# EAGLE board melody generator (EAGLE 6.5.0)
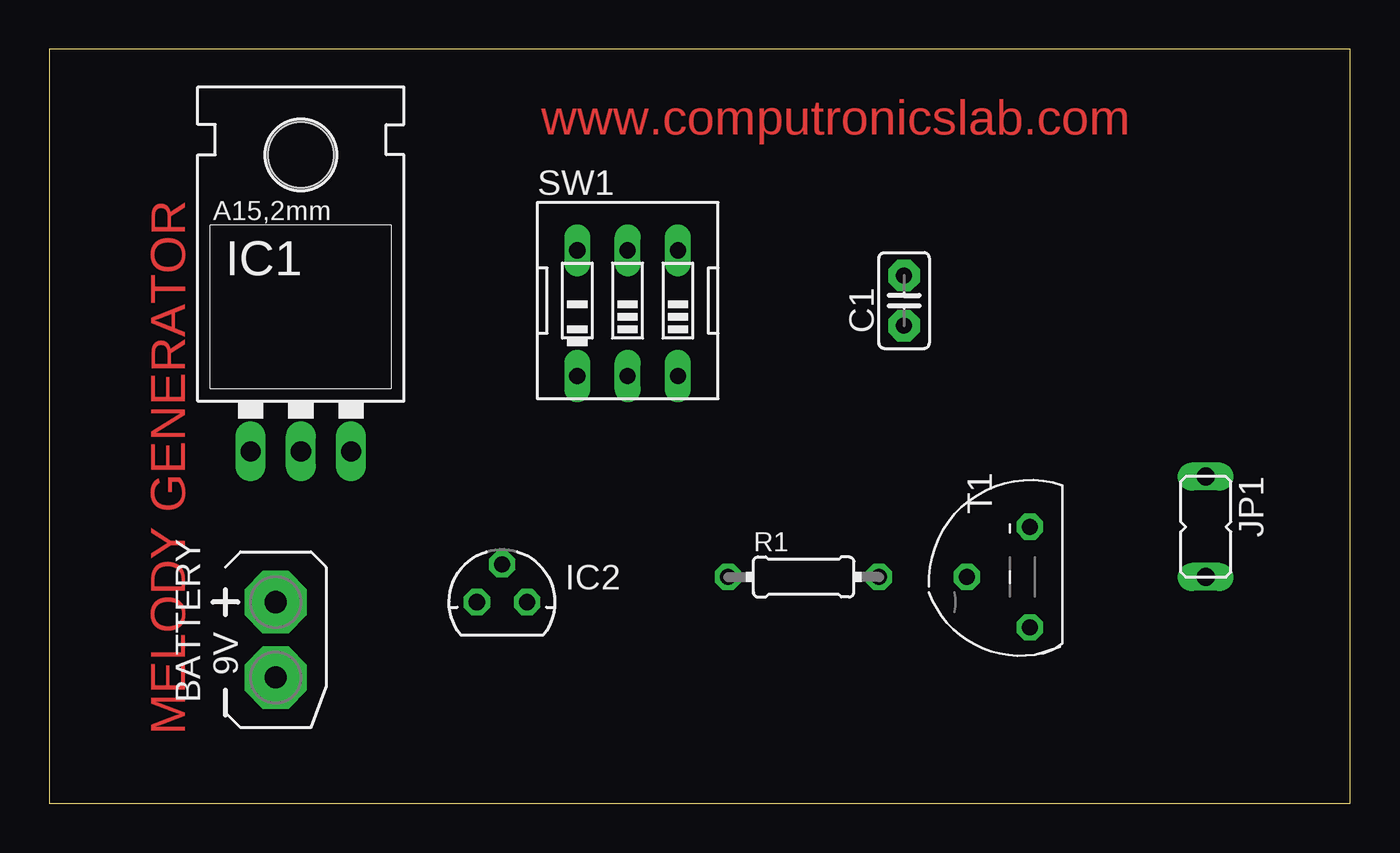
[diagram p0: board, top side]
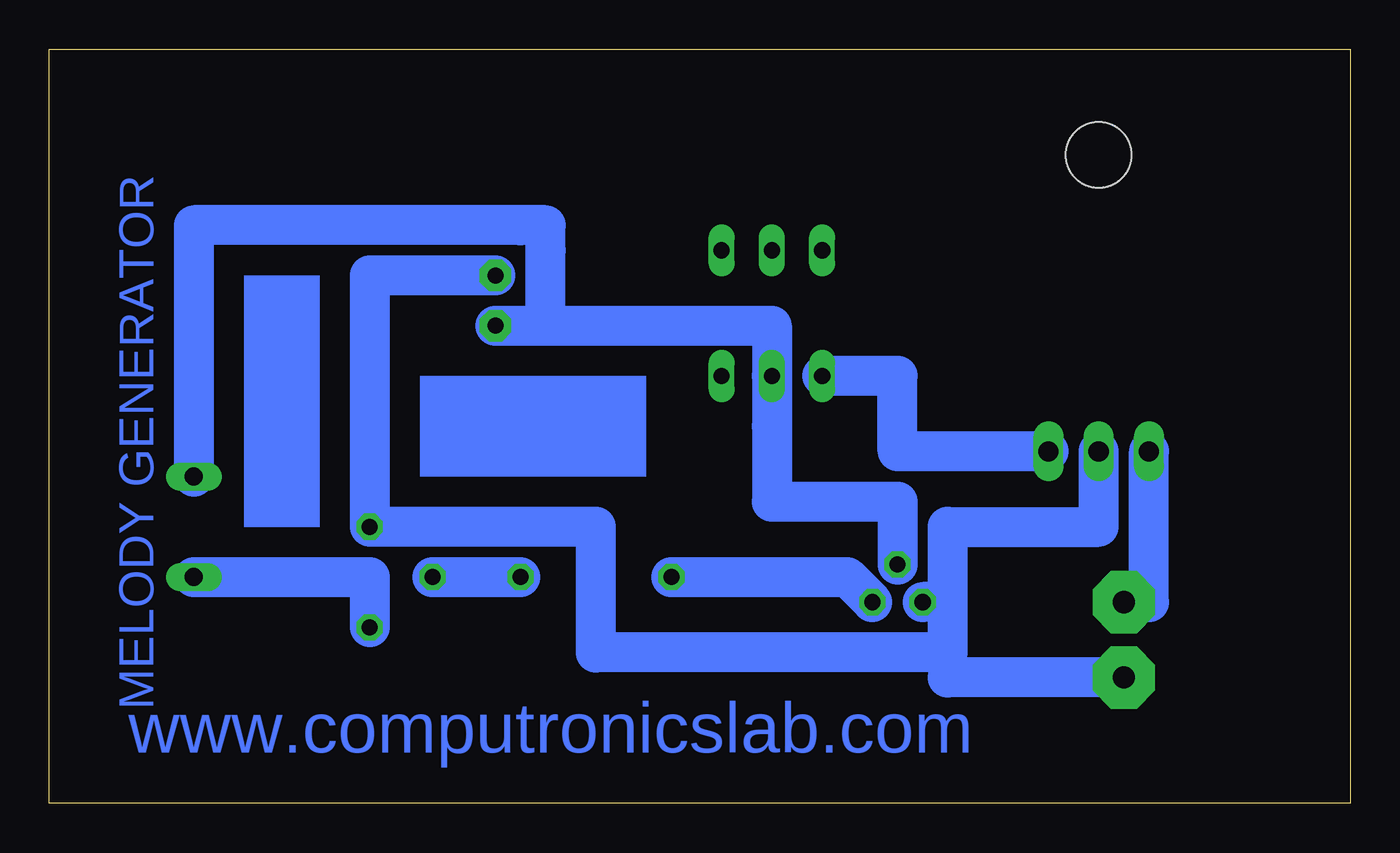
[diagram p1: board, bottom side, seen from below]

Size 65.71 x 38.09 mm. Coordinates in mm from the lower left corner, seen from the top.
Outline: 0,0 65.71,0 65.71,38.09 0,38.09 0,0
Copper layers (1*16): Top 0.035mm / dielectric 1.5mm / Bottom 0.035mm
Design rules "default *": minimum track width 80mil, minimum drill 24mil, track to track 8mil, track to pad 8mil, pad to pad 8mil, via to via 8mil, smd to smd 8mil, copper to edge 40mil, drill to drill 8mil, minimum pad ring 10mil, minimum via ring 8mil, stop-mask expansion 4mil, vias tented up to drill 0mil, thermal gap 10mil

## Footprints (pad centres in the part's own frame; a part is rotated, then mirrored left to right if it is on the bottom)
AB9V = drill 1.118 pad 3.15 octagon: + 0,2.54; - 0,-1.27
C2.5-2 = drill 0.813 pad 1.6 octagon: 1 -1.27,0; 2 1.27,0
78XXL = drill 1.016 long: GND 0,-3.81; IN -2.54,-3.81; OUT 2.54,-3.81 | hole 3.302: 0,11.176
79LXX = drill 0.813 octagon: GND -1.27,0; IN 0,1.905; OUT 1.27,0
JP1 = drill 0.914 long: 1 0,-2.54; 2 0,2.54
0204/7 = drill 0.813 octagon: 1 -3.81,0; 2 3.81,0
EDG-03 = drill 0.813 long: 1 -2.54,-3.81; 2 0,-3.81; 3 2.54,-3.81; 4 2.54,2.54; 5 0,2.54; 6 -2.54,2.54
TO92 = drill 0.813 octagon: 1 2.54,-1.27; 2 0,1.905; 3 -2.54,-1.27

## Placement (x,y rotation side)
BATTERY  A9V  [AB9V]  11.43,7.62 0 top
C1  0.1uf  [C2.5-2]  43.18,25.4 90 top
IC1  7805  [78XXL]  12.7,21.59 0 top
IC2  UM66  [79LXX]  22.86,10.16 0 top
JP1  spekar  [JP1]  58.42,13.97 180 top
R1  4.7k  [0204/7]  38.1,11.43 0 top
SW1  on/off switch  [EDG-03]  29.21,25.4 0 top
T1  BC547  [TO92]  48.26,11.43 90 top

## Library data of the parts
BATTERY = battery
C1 = capacitor-wima
IC1 IC2 = v-reg
JP1 = jumper
R1 = rcl
SW1 = special
T1 = transistor

## Nets
N$1: IC2.OUT R1.1
N$2: R1.2 T1.2
N$3: BATTERY.+ IC1.IN
N$4: BATTERY.- C1.2 IC1.GND IC2.GND T1.1
N$5: IC1.OUT SW1.1
N$6: C1.1 IC2.IN JP1.1 SW1.2
N$7: JP1.2 T1.3

## Tracks (layer width: path | path; a pad name or v marks a point on that pad's centre or on a via)
N$1
  Bottom 2.032: IC2.OUT 25.4,11.43 R1.1
N$2
  Bottom 2.032: T1.2 R1.2
N$3
  Bottom 2.032: IC1.IN 10.16,10.16 BATTERY.+
N$4
  Bottom 0.406: 20.32,8.25 20.32,6.35
  Bottom 2.032: C1.2 49.53,26.67 T1.1 38.1,13.97 38.1,7.62 20.32,7.62 20.32,8.25 20.32,10.16 | 20.32,10.16 IC2.GND | BATTERY.- 20.32,6.35 | IC1.GND 12.7,13.97 20.32,13.97 20.32,10.16
N$5
  Bottom 2.032: SW1.1 22.86,21.59 22.86,17.78 IC1.OUT
N$6
  Bottom 2.032: IC2.IN 22.86,12.7 22.86,15.24 29.21,15.24 29.21,19.05 SW1.2 29.21,24.13 40.64,24.13 | JP1.1 58.42,29.21 41.91,29.21 40.64,29.21 40.64,27.94 40.64,24.13 | C1.1 40.64,24.13
N$7
  Bottom 2.032: T1.3 49.53,11.43 52.07,11.43 JP1.2
(copper drawn outside any net)
  shapes: Bottom area x2

## Text on the board
Top: www.computronicslab.com | MELODY GENERATOR
Bottom: MELODY GENERATOR | www.computronicslab.com